# Altium PCB AT25EU - Chipset 16MBit SPI.PcbDoc
Units mm, origin at the board's own origin, x right, y up, seen from the top; angles counter-clockwise.
Board outline 26.92 x 27.18 mm, 2 copper layers (Top Layer, Bottom Layer); 9 components, 13 nets, 30 pads, 3 vias.
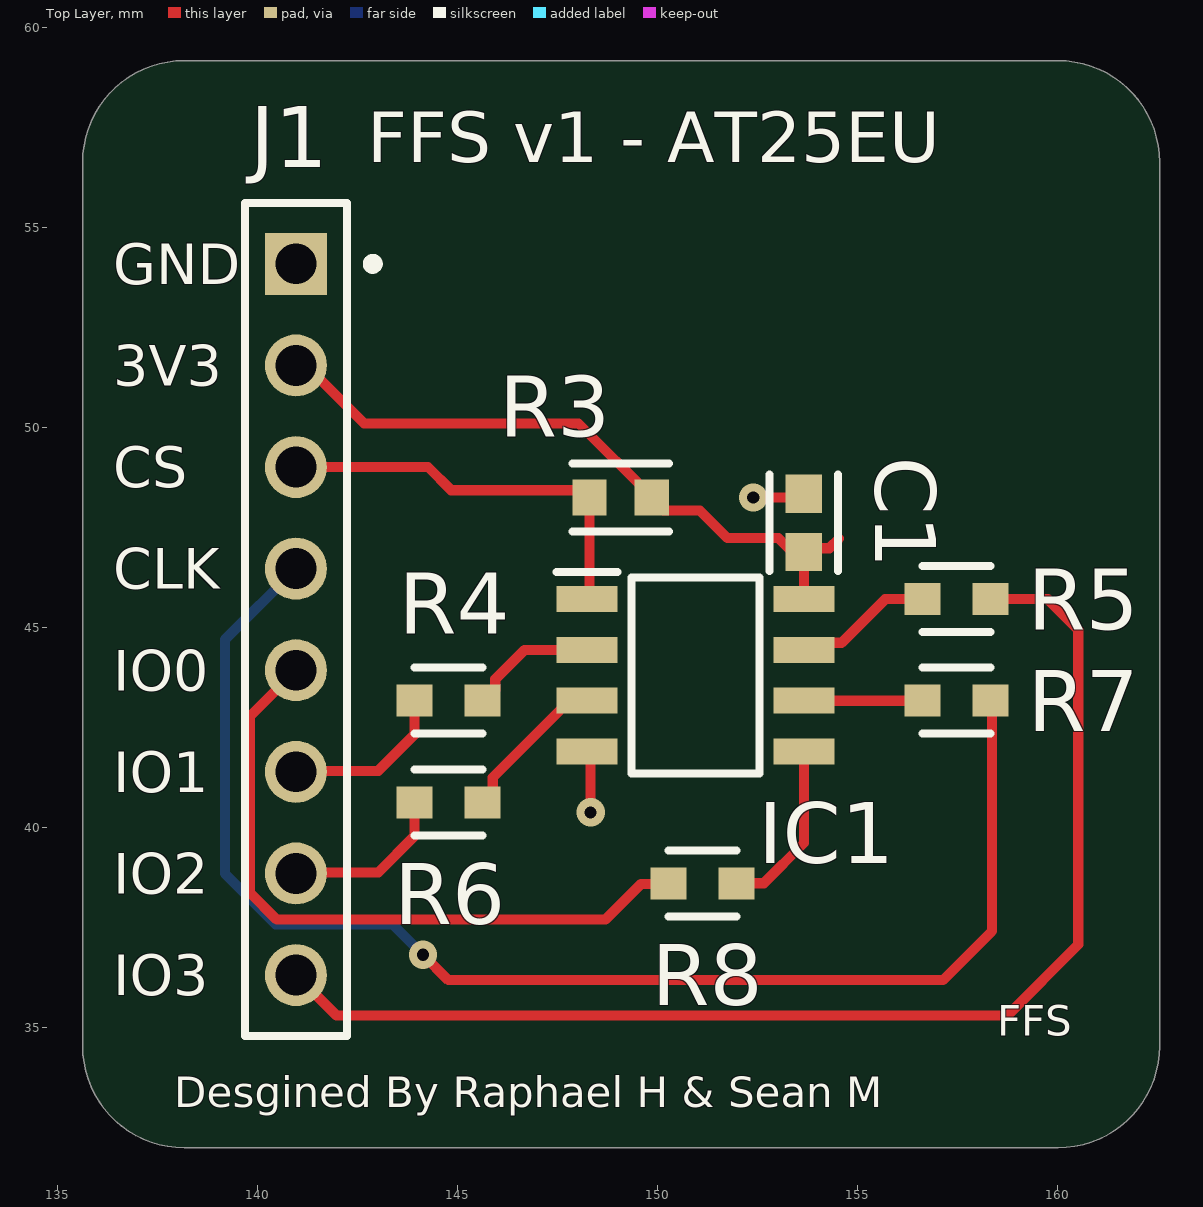
[diagram p0: Top Layer view]
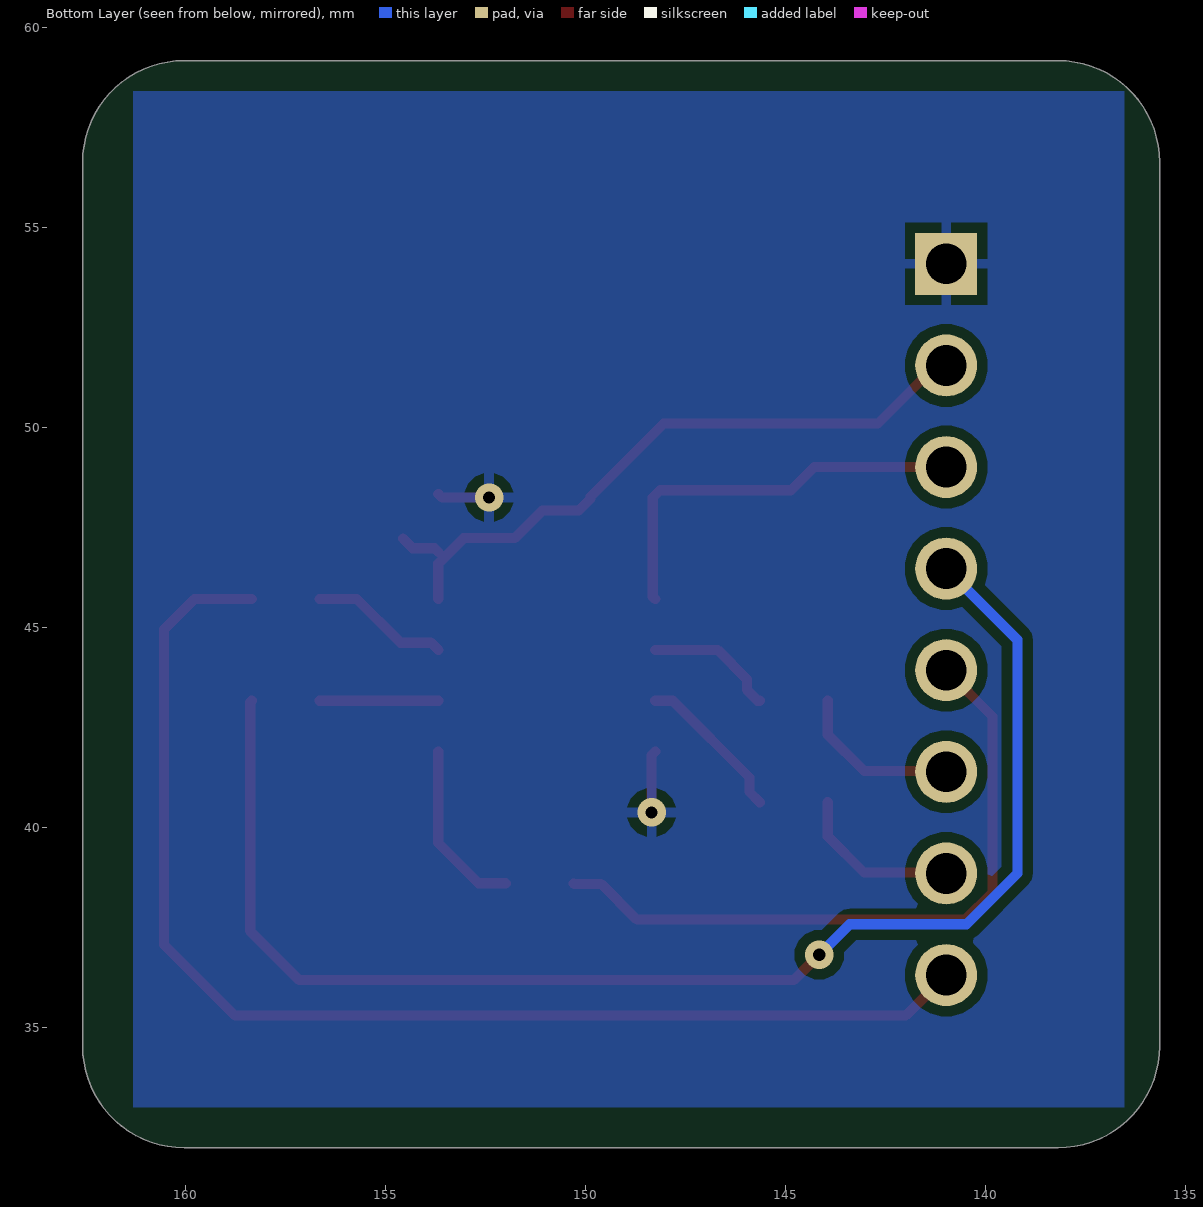
[diagram p1: Bottom Layer view, seen from below]
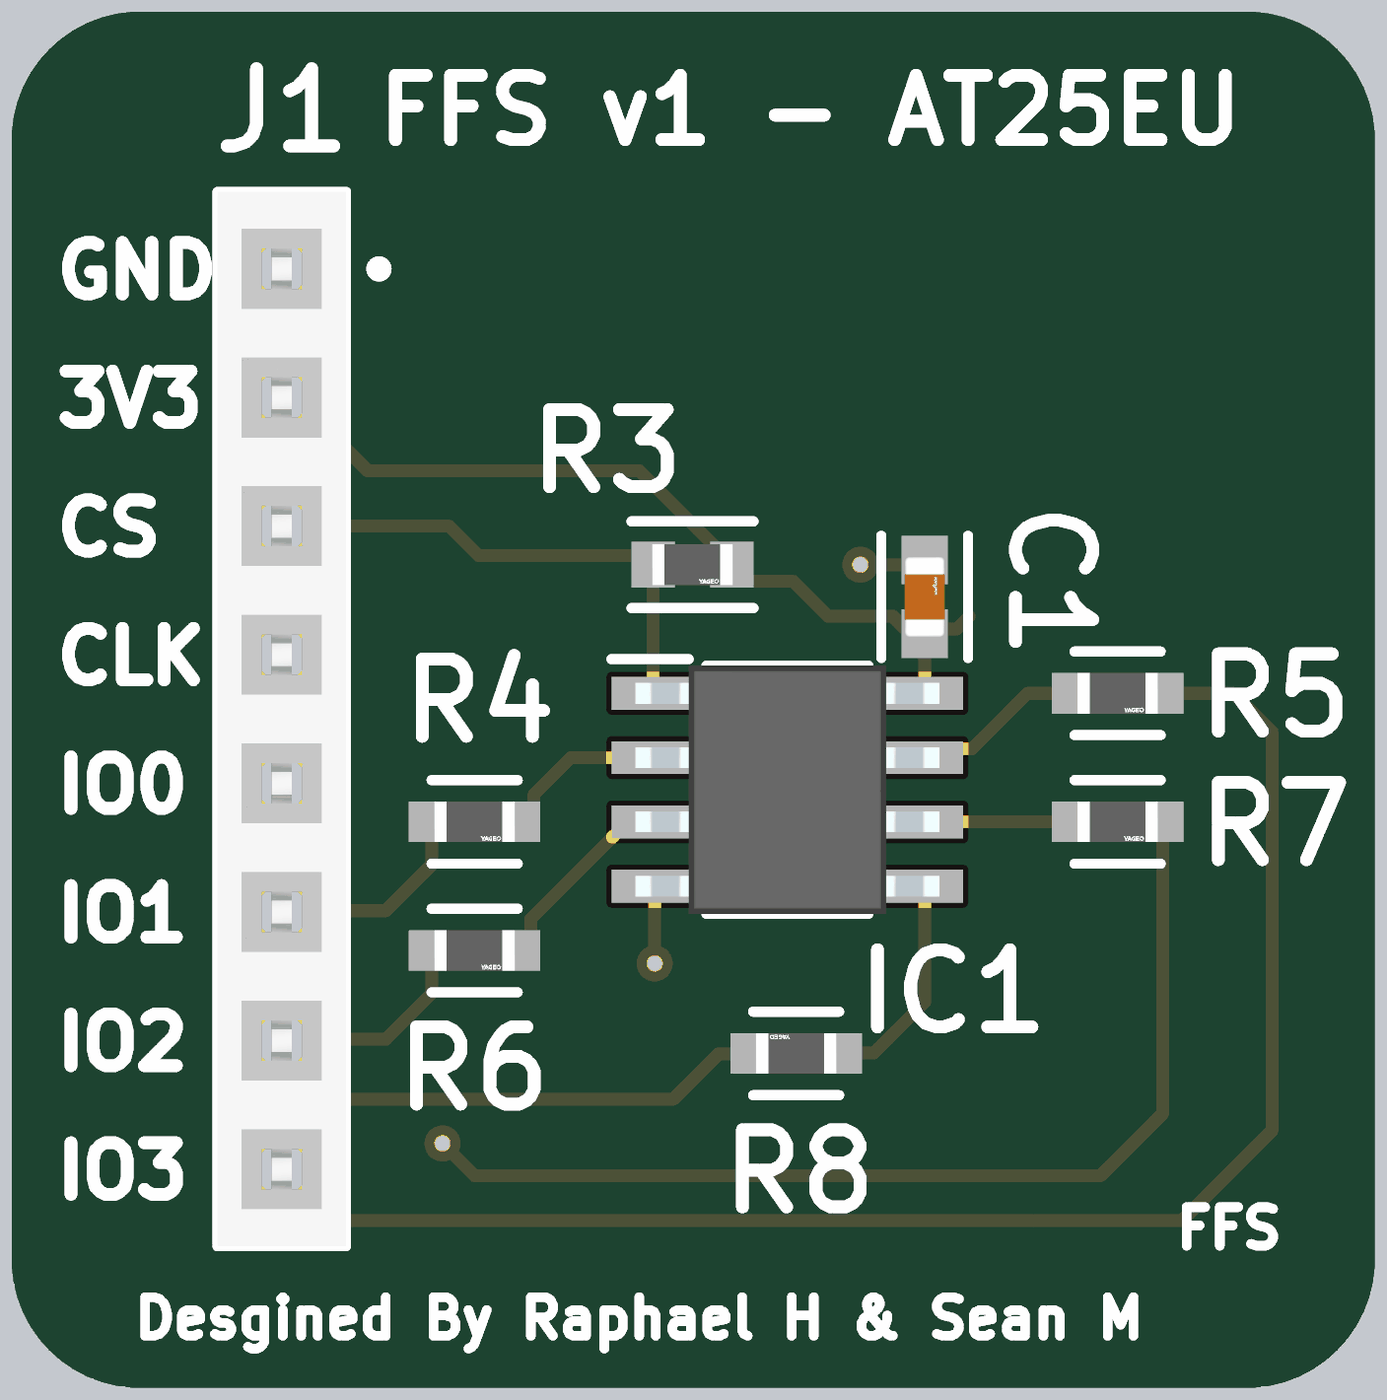
[diagram p2: 3D render of the assembled board from above, using the file's embedded part models]

## Layer stack, top to bottom
Top Solder: solder mask 0.0102, Solder Resist, Dk 3.5
Top Layer: signal copper 0.0356
Dielectric 1: dielectric 0.32, FR-4, Dk 4.8
Bottom Layer: signal copper 0.0356
Bottom Solder: solder mask 0.0102, Solder Resist, Dk 3.5

## Board outline
135.636,34.544 135.636,56.642 cw(c138.176,56.642) 138.176,59.182 160.02,59.182 cw(c160.02,56.642) 162.56,56.642 162.56,34.544 cw(c160.02,34.544) 160.02,32.004 138.176,32.004 cw(c138.176,34.544)

## Design rules (kind name [scope] priority, off if disabled: settings)
Clearance [All] p1: gap=0.254 ignorepadtopadclearanceinfootprint=FALSE
PolygonConnect [All] p1: connectstyle=Relief reliefconductorwidth=0.254 reliefentries=4 polygonreliefangle="90 Angle" airgapwidth=0.254
RoutingVias [All] p1: holewidth=0.711 width=1.27 viastyle="Through Hole" minholewidth=0.711 minwidth=1.27 maxholewidth=0.711 maxwidth=1.27
SolderMaskExpansion [All] p1: expansion=0.102 istentingtop=FALSE
Width [All] p1: maxlimit=0.254 minlimit=0.254 preferedwidth=0.254
30 further rules are at their usual default settings.

## Components (designator, comment, footprint, x,y, rotation, side; value= is the part's Value field where it differs from the comment)
C1 "GCM188R71" FP-GCM188-0_1-IPC_B 153.67,47.625 r90 top
IC1 "AT25EU0081A-SSUN-T" SOIC127P600X175-8N 150.958,43.815 r0 top
J1 "PPPC081LFBN-RC" SLIN-PPPC081LFBN-RC_V 140.97,45.212 r270 top locked
R3 "AC0603FR-07910KL" FP-AC0603-IPC_B 149.083,48.26 r0 top
R4 "10R" FP-AC0603-MFG 144.78,43.18 r0 top
R5 "10R" FP-AC0603-MFG 157.48,45.72 r0 top
R6 "10R" FP-AC0603-MFG 144.78,40.64 r0 top
R7 "10R" FP-AC0603-MFG 157.48,43.18 r0 top
R8 "10R" FP-AC0603-MFG 151.13,38.608 r180 top

## Footprints (in the part's own frame and the unit in brackets; to place one, negate y for a bottom-side part, rotate by r counter-clockwise, add the part's x,y. Pads: shape width x height; smd on the part's side, far side on the other; paste and mask are expansions set on the pad)
FP-AC0603-IPC_B [mm]
  rect 0.859x0.912 smd paste+0 mask+0: 1(-0.777,0) 2(0.777,0)
  silkscreen extent -1.21,-0.86 1.21,0.86, body extent -1.46,-0.71 1.46,0.71, height 0.25
FP-AC0603-MFG [mm]
  rect 0.9x0.8 smd paste+0 mask+0: 1(-0.85,0) 2(0.85,0)
  silkscreen extent -0.85,-0.82 0.85,0.82, body extent -1.4,-0.55 1.4,0.55, height 0.25
FP-GCM188-0_1-IPC_B [mm]
  rect 0.959x0.912 smd paste+0 mask+0: 1(-0.727,0) 2(0.727,0)
  silkscreen extent -1.21,-0.86 1.21,0.86, body extent -1.46,-0.71 1.46,0.71, height 0.25
SLIN-PPPC081LFBN-RC_V [mm] "THD, 8-Leads, Body 20.82x2.54mm, Pitch 2.54mm"
  rect 1.55x1.55 hole 1.02: 1(-8.89,0)
  round 1.55 hole 1.02: 2(-6.35,0) 3(-3.81,0) 4(-1.27,0) 5(1.27,0) 6(3.81,0) 7(6.35,0) 8(8.89,0)
  silkscreen extent -10.41,-1.27 10.41,2.05, body extent -10.41,-1.27 10.41,1.27, height 8.5
SOIC127P600X175-8N [mm]
  rect 1.525x0.65 smd: 1(-2.712,1.905) 2(-2.712,0.635) 3(-2.712,-0.635) 4(-2.712,-1.905) 5(2.712,-1.905) 6(2.712,-0.635) 7(2.712,0.635) 8(2.712,1.905)
  silkscreen extent -3.47,-2.45 1.6,2.58, body extent -3,-2.45 3,2.45, height 1.75

## Part data
C1: library part CMP-2006-02357-2, "Ceramic Capacitor for Automotive 1uF  ±10% 16VDC X7R 0603 Paper T/R", Capacitance=1uF, Case Code (Imperial)=0603, Case Code (Metric)=1608, Dielectric=X7R, Max Operating Temperature=125°C, Min Operating Temperature=-55°C, Package Quantity=1, Ratings=AEC-Q200, Tolerance=10%, Voltage=16V, Case/Package=0603, Depth=0.8mm, Height=0.8mm, Lead Free="Lead Free", Length=1.6mm, Mount="Surface Mount", Packaging="Tape and Reel", Radiation Hardening=No, REACH SVHC="No SVHC", Termination=SMD/SMT, Thickness=0.035inch, Voltage Rating=16V, Voltage Rating (DC)=16V, Width=0.031inch
IC1: "Integrated Circuit", Manufacturer_Name="Renesas Electronics", Datasheet Link=https://www.renesas.com/us/en/document/dst/at25eu0081a-datasheet, Height=1.75mm, Manufacturer_Part_Number=AT25EU0081A-SSUN-T
J1: library part CMP-002-00028-2, "Female Header, Pitch 2.54 mm, 1 x 8 Position, Height 8.5 mm, Tail Length 3.2 mm, -40 to 105 degC, RoHS, Bulk", Manufacturer=Sullins, Max Operating Temperature=105°C, Min Operating Temperature=-40°C, Package Description="Female Header, Pitch 2.54 mm, 1 x 8 Position, Height 8.5 mm, Tail Length 3.2 mm", Case/Package=PPPC081LFBN-RC, Connector Type=Header, Datasheet URL=http://sullinscorp.com/catalogs/101_PAGE114-115_.100_FEMALE_HDR.pdf, Datasheet Version=Jan-15, Gender=Female, Mounting Technology=TH, Package Reference=PPPC081LFBN-RC, RoHS Compliant=Unknown
R3: library part CMP-03412-028406-2, "RES 910KΩ 1.00% 0.1W 0603", Case Code (Imperial)=0603, Case Code (Metric)=1608, Max Operating Temperature=155°C, Max Power Dissipation=100mW, Min Operating Temperature=-55°C, Resistance=910kR, Resistor Type="Thick Film", Temperature Coefficient=100ppm/°C, Tolerance=1%, Voltage Rating=50V, Case/Package=0603, Features="Moisture Resistant", Height=0.022inch, Length=0.063inch, Number of Terminations=2, Packaging="Tape and Reel", Power Rating=100mW, RoHS Compliant=Yes, Series=AC, Termination=SMD/SMT, Width=0.8mm
R4 R5 R6 R7 R8: library part CMP-2000-04819-3, "RES 10Ω 1.00% 0.1W 0603", Case Code (Imperial)=0603, Case Code (Metric)=1608, Max Operating Temperature=155°C, Max Power Dissipation=100mW, Min Operating Temperature=-55°C, Package Quantity=1, Resistor Type="Thick Film", Temperature Coefficient=200ppm/°C, Tolerance=1%, Voltage Rating=50V, Working Voltage=75V, Case/Package=0603, Features="Moisture Resistant", Height=0.022inch, Lead Free="Lead Free", Length=0.063inch, Moisture Sensitivity Level=1, Number of Terminations=2, Packaging="Tape and Reel", Power Rating=100mW, Resistance=10R, RoHS Compliant=Yes, Series=AC, Technology="THICK FILM", Termination=SMD/SMT, Width=0.031inch

## Via types
v1: diameter 0.711, hole 0.305, Top Layer to Bottom Layer, tented both sides, 3 vias

## Nets (pads, with @x,y where several pads share a name; then routed paths per layer and width w, separated by ;. In a path a pad name is that pad's centre, name@x,y a point inside that pad or via, vN(x,y) a via of type N, cw(c..) or ccw(c..) an arc to the next point about the centre after c; other vN are vias at no path point)
+3v3: C1.1 IC1.8 J1.2 R3.2 | length 16.4
  Top Layer w0.254: J1.2@141.224,51.562 142.674,50.112 148.035,50.112 149.86,48.287 R3.2 149.86,48.233 150.162,47.931 151.071,47.931 151.758,47.244 153.033,47.244 153.67,46.607 IC1.8 ; C1.1 153.762,46.99 154.305,46.99 154.547,47.232
CLK: J1.4 R7.2 | length 35.2
  Top Layer w0.254: J1.4@140.684,46.482 J1.4 ; v1(144.145,36.83) 144.78,36.195 157.144,36.195 158.369,37.42 158.369,43.141 R7.2
  Bottom Layer w0.254: J1.4 139.192,44.704 139.192,38.862 140.462,37.592 143.383,37.592 v1(144.145,36.83)
CS: IC1.1 J1.3 R3.1 | length 10.2
  Top Layer w0.254: J1.3 144.272,49.022 144.851,48.443 148.124,48.443 R3.1 148.307,45.781 IC1.1
GND: C1.2 IC1.4 J1.1 | length 3
  Top Layer w0.254: IC1.4 148.336,41.82 v1(148.336,40.386) ; v1@152.4,48.384 v1(152.4,48.26) 153.578,48.26 C1.2
IO0: J1.5 R8.2 | length 17.2
  Top Layer w0.254: J1.5 139.814,42.786 139.814,38.383 140.491,37.706 148.704,37.706 149.598,38.6 150.272,38.6 R8.2
IO1: J1.6 R4.1 | length 4.2
  Top Layer w0.254: J1.6 140.994,41.426 143.026,41.426 143.93,42.33 R4.1
IO2: J1.7 R6.1 | length 4.2
  Top Layer w0.254: J1.7 140.994,38.886 143.026,38.886 143.93,39.79 R6.1
IO3: J1.8 R5.2 | length 31.1
  Top Layer w0.254: J1.8 141.986,35.306 158.75,35.306 160.528,37.084 160.528,44.958 159.766,45.72 R5.2
NetIC1_2: IC1.2 R4.2 | length 3.3
  Top Layer w0.254: R4.2 145.68,43.18 145.953,43.453 145.953,43.718 146.685,44.45 IC1.2
NetIC1_3: IC1.3 R6.2 | length 3.9
  Top Layer w0.254: R6.2 145.89,40.9 145.89,41.261 147.808,43.18 IC1.3
NetIC1_5: IC1.5 R8.1 | length 4.4
  Top Layer w0.254: R8.1 151.988,38.616 152.662,38.616 153.67,39.624 IC1.5
NetIC1_6: IC1.6 R7.1 | length 3
  Top Layer w0.254: IC1.6 R7.1
NetIC1_7: IC1.7 R5.1 | length 3.5
  Top Layer w0.254: IC1.7 153.848,44.628 154.61,44.628 155.702,45.72 R5.1

## Polygon pours and split planes (outlines as drawn)
GND on Bottom Layer "GND_L02_P000" (solid, remove dead copper, pour order 0): 136.525,58.42 161.29,58.42 161.29,33.02 136.525,33.02

## Silkscreen, mask and mechanical layers (free items; w line width, h text height)
Top Overlay:
  text "FFS v1 - AT25EU" at 142.748,56.642 h1.27
  text "GND" at 136.398,53.594 h1.02
  text "3V3" at 136.398,51.054 h1.02
  text "CS" at 136.398,48.514 h1.02
  text "CLK" at 136.398,45.974 h1.02
  text "IO0" at 136.398,43.434 h1.02
  text "IO1" at 136.398,40.894 h1.02
  text "IO2" at 136.398,38.354 h1.02
  text "IO3" at 136.398,35.814 h1.02
  text "FFS" at 158.496,34.798 h0.76
  text "Desgined By Raphael H & Sean M" at 137.922,33.02 h0.76
Mechanical 1:
  the board outline again, w0.254